# Altium PCB ECG.PcbDoc
Units mil, origin at the board's own origin, x right, y up, seen from the top; angles counter-clockwise.
Board outline 3270 x 1180 mil, 2 copper layers (Top Layer, Bottom Layer), stack 62.8 mil thick; 47 components, 28 nets, 142 pads, 7 vias.
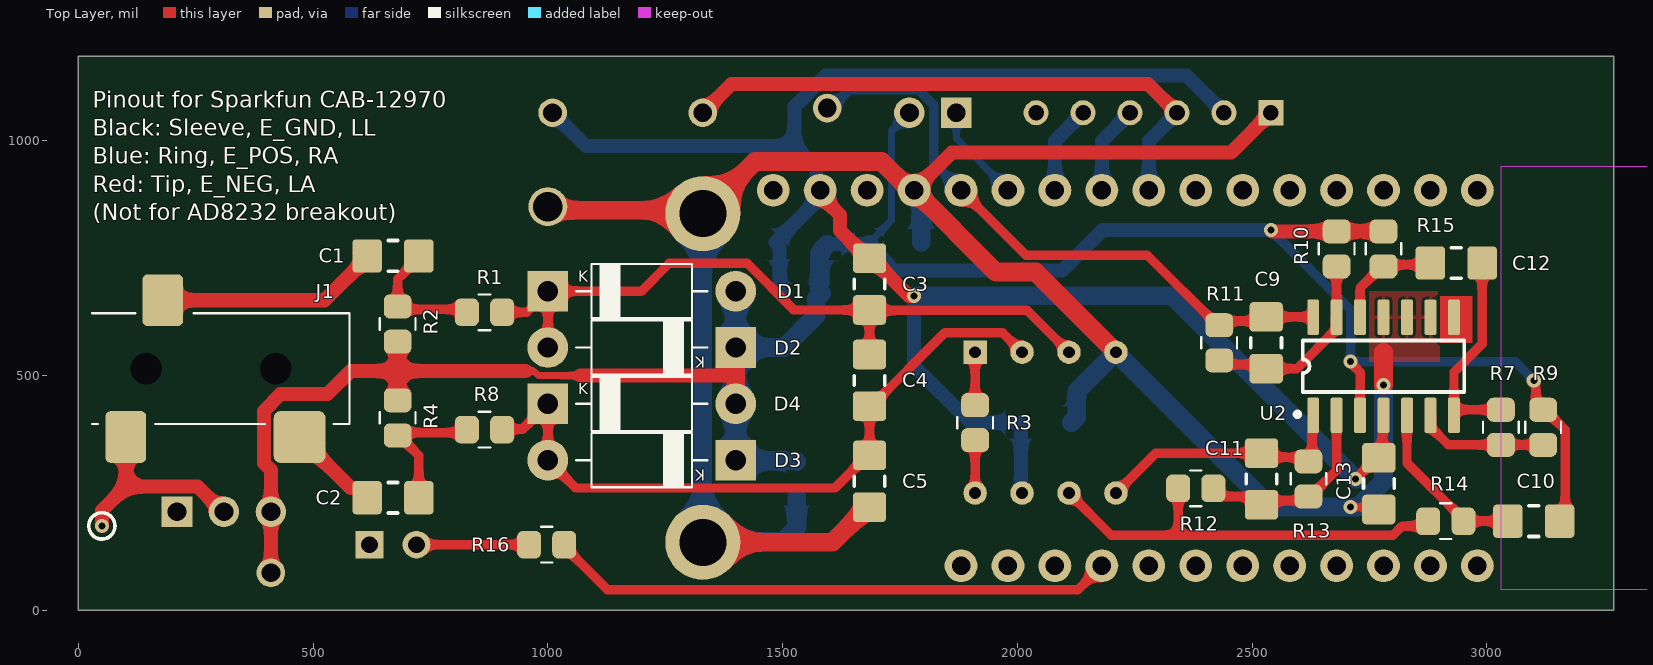
[diagram p0: Top Layer view]
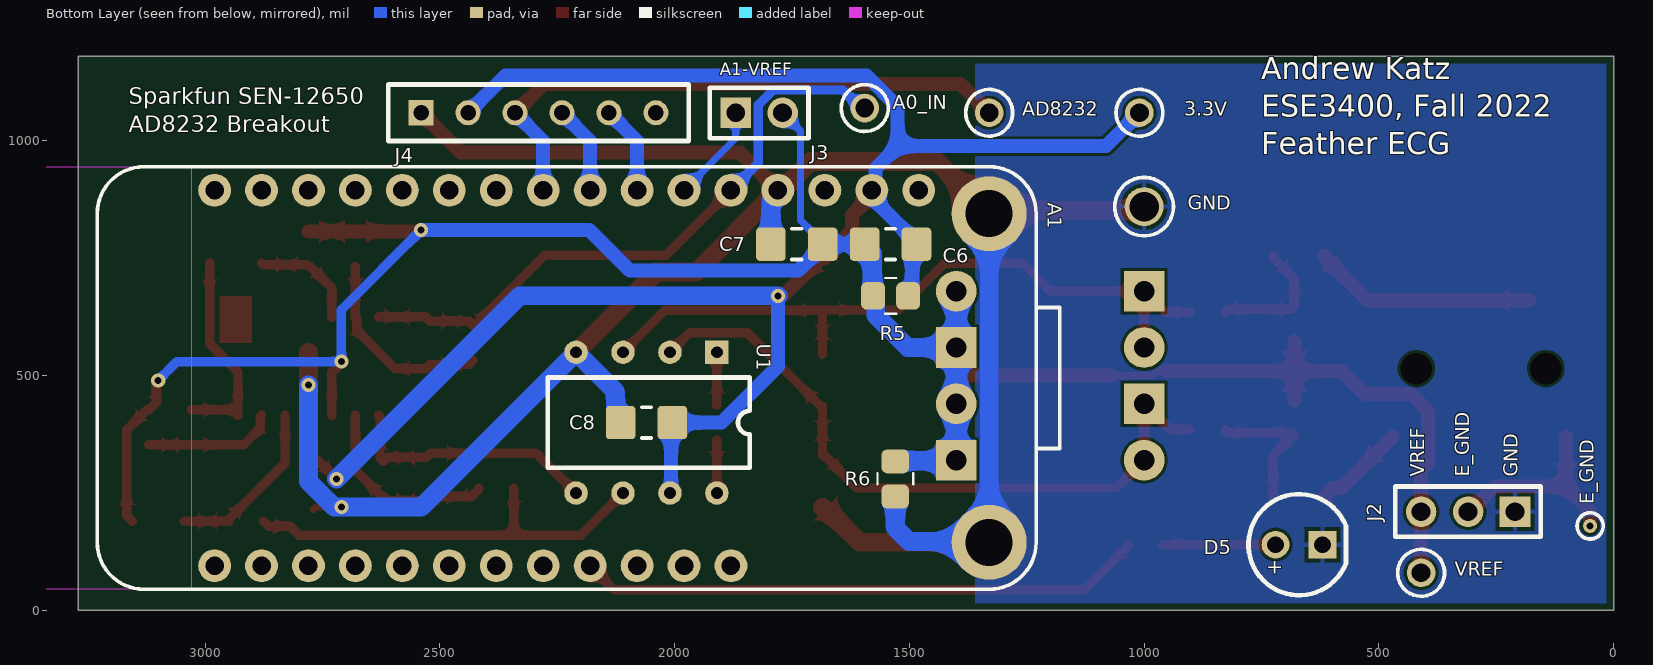
[diagram p1: Bottom Layer view, seen from below]
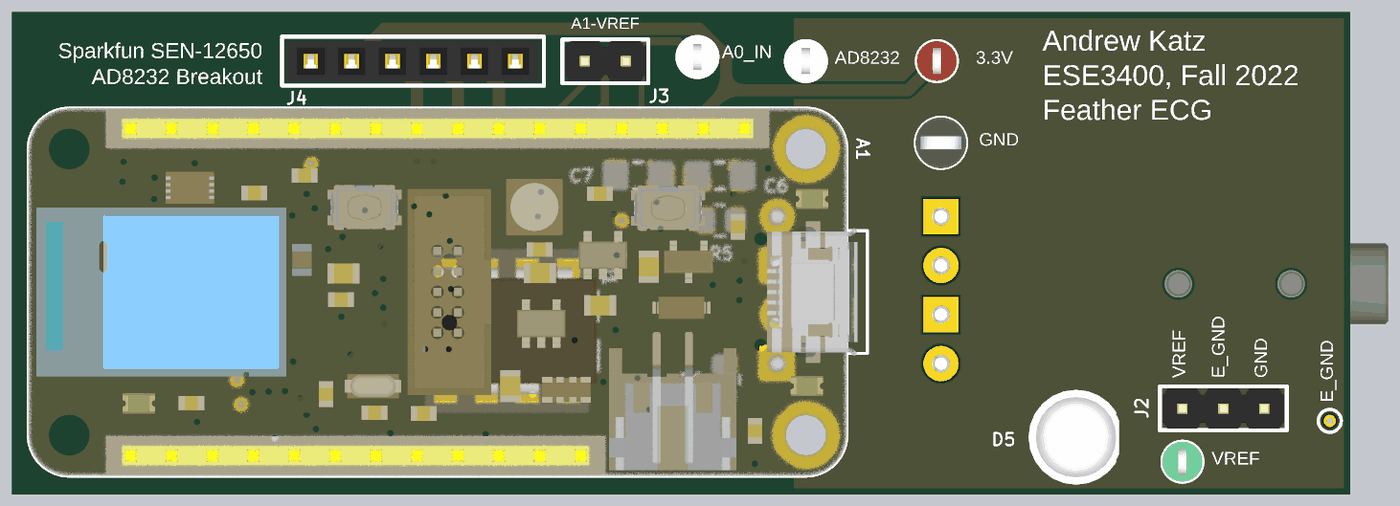
[diagram p2: 3D render of the assembled board from below, using the file's embedded part models]

## Layer stack, top to bottom
Top Solder: solder mask 1, PSR-4000BN, Dk 4.5
Top Layer: signal copper 1.4
Dielectric 1: core 60, Kingboard KB6167F, Dk 4.5
Bottom Layer: signal copper 1.4
Bottom Solder: solder mask 1, PSR-4000BN, Dk 4.5

## Board outline
0,0 3270,0 3270,1180 0,1180

## Design rules (kind name [scope] priority, off if disabled: settings)
AcuteAngle [All] p1: minimum=6.00000000000000E+0001 checktracksonly=FALSE
BoardOutlineClearance [All] p1: gap=15 ignorepadtopadclearanceinfootprint=FALSE
Clearance [All] p1: gap=6 ignorepadtopadclearanceinfootprint=FALSE except(0: Arc-Hole Track-Hole SMDPad-Hole THPad-Hole Via-Hole Fill-Hole Poly-Hole Region-Hole Text-Hole)
ComponentClearance [All] p1: gap=1 collisioncheckmode=3 verticalgap=1 showdistances=FALSE
DiffPairsRouting [All] p1: maxlimit=393.7 minlimit=6 mostfreqgap=8 toplayer_minwidth=6 toplayer_maxwidth=15 toplayer_prefwidth=8 bottomlayer_minwidth=6 bottomlayer_maxwidth=15 bottomlayer_prefwidth=8 maxuncoupledlength=500
HoleSize [All] p1: absolutevalues=TRUE maxlimit=265 minlimit=13 maxpercent=80.000 minpercent=20.000
HoleToHoleClearance [All] p1: gap=10 allowstackedmicrovias=FALSE
MinimumAnnularRing [All] p1: minimumring=7
MinimumSolderMaskSliver [All] p1: minsoldermaskwidth=0
PlaneClearance [All] p1: clearance=10
PlaneConnect [All] p1: planeconnectstyle=Direct reliefexpansion=16 reliefentries=4 reliefconductorwidth=6 reliefairgap=6
PolygonConnect [All] p1: thpad.connectstyle=Relief thpad.reliefconductorwidth=10 thpad.reliefentries=4 thpad.polygonreliefangle="90 Angle" thpad.airgapwidth=8 smdpad.connectstyle=Relief smdpad.reliefconductorwidth=8 smdpad.reliefentries=4 smdpad.polygonreliefangle="90 Angle" smdpad.airgapwidth=6 via.connectstyle=Direct via.reliefconductorwidth=8 via.reliefentries=4 via.polygonreliefangle="90 Angle" via.airgapwidth=6
RoutingCorners [All] p1: cornerstyle=45-Degree minsetback=49.21 maxsetback=49.21
RoutingVias [All] p1: holewidth=15 width=30 viastyle="Through Hole" minholewidth=13 minwidth=27 maxholewidth=100 maxwidth=114
SMDNeckDown [All] p1: percent=90.000
SilkToSilkClearance [All] p1: silktosilkclearance=0
SilkToSolderMaskClearance [IsPad] p1: minsilkscreentomaskgap=6 clearancetoexposedcopper=TRUE
SolderMaskExpansion [All] p1: expansion=2.95 istentingtop=FALSE
Width [All] p1: maxlimit=400 minlimit=6 preferedwidth=8
20 further rules are at their usual default settings.

## Components (designator, comment, footprint, x,y, rotation, side; value= is the part's Value field where it differs from the comment)
3.3V "5000" KSTN-5000 1010,1060 r180 bottom
A0_IN "5002" KSTN-5002 1595,1070 r180 bottom
A1 "Feather nRF52840 Express" "4062-Stacking Headers" 2230,495 r270 bottom locked
AD8232 "5002" KSTN-5002 1330,1060 r180 bottom
C1 "CAP 1206 1.0UF 50V 10% X7R" 1206_CAP 670,755 r0 top value=1.0UF
C2 "CAP 1206 1.0UF 50V 10% X7R" 1206_CAP 670,240 r0 top value=1.0UF
C3 "CAP 1206 1000PF 50V 10% X7R" 1206_CAP 1685,695 r90 top value=1000PF
C4 "CAP 1206 0.01UF 50V 10% X7R" 1206_CAP 1685,490 r90 top value=0.01UF
C5 "CAP 1206 1000PF 50V 10% X7R" 1206_CAP 1685,275 r90 top value=1000PF
C6 "CAP 1206 0.1UF 50V 10% X7R" 1206_cap_35H 1540,780 r0 bottom value=0.1UF
C7 "CAP 1206 0.1UF 50V 10% X7R" 1206_cap_35H 1740,780 r0 bottom value=0.1UF
C8 "CAP 1206 0.1UF 50V 10% X7R" 1206_cap_35H 2060,400 r0 bottom value=0.1UF
C9 "CAP 1206 0.47UF 50V 10% X7R" 1206_CAP 2530,570 r90 top value=0.47UF
C10 "CAP 1206 0.01UF 50V 10% X7R" 1206_CAP 3100,190 r0 top value=0.01UF
C11 "CAP 1206 0.47UF 50V 10% X7R" 1206_CAP 2520,280 r270 top value=0.47UF
C12 "CAP 1206 1.0UF 100V 10% X7R" 1206_CAP 2934.88,740 r180 top value=1.0UF
C13 "CAP 1206 0.1UF 50V 10% X7R" 1206_cap_35H 2770,270 r270 top value=0.1UF
D1 "1N4001" "DO-41 0.4in Spacing" 1200,680 r0 top
D2 "1N4001" "DO-41 0.4in Spacing" 1200,560 r180 top
D3 "1N4001" "DO-41 0.4in Spacing" 1200,320 r180 top
D4 "1N4001" "DO-41 0.4in Spacing" 1200,440 r0 top
D5 "WP7113SGD" "T-1 3/4 LED" 670,140 r0 bottom
E_GND "Testpad" "Test PTH 15-30" 50,180 r180 bottom
GND "5011" KSTN-5011_V 1000,860 r180 bottom
J1 "SJ-3523-SMT-TR" SJ-3524-SMT-TR-Footprint-1 144.41,515 r0 top
J2 "MHDR 1X3" PH1-03-UA 310,210 r0 bottom
J3 "MHDR 1X2" PH1-02-UA 1820,1060 r180 bottom
J4 "FHDR 1X6" "FHDR 1X6-Footprint-1" 2290,1060 r180 bottom
R1 "RES 0805 47K 1%" 0805_RES 865,635 r0 top value=47K
R2 "RES 0805 1M 1%" 0805_RES 680,610 r90 top value=1M
R3 "RES 0805 2.7K 1%" 0805_RES 1910,400 r270 top value=2.7K
R4 "RES 0805 1M 1%" 0805_RES 680,410 r90 top value=1M
R5 "RES 0805 1K 1%" 0805_RES 1540,670 r180 bottom value=1K
R6 "RES 0805 1K 1%" 0805_RES 1530,280 r90 bottom value=1K
R7 "RES 0805 270K 1%" 0805_RES 3030,390 r90 top value=270K
R8 "RES 0805 47K 1%" 0805_RES 865,385 r0 top value=47K
R9 "RES 0805 24K 1%" 0805_RES 3120,390 r270 top value=24K
R10 "RES 0805 330K 1%" 0805_RES 2680,770 r270 top value=330K
R11 "RES 0805 330K 1%" 0805_RES 2430,570 r90 top value=330K
R12 "RES 0805 330K 1%" 0805_RES 2380,260 r180 top value=330K
R13 "RES 0805 330K 1%" 0805_RES 2620,280 r270 top value=330K
R14 "RES 0805 100K 1%" 0805_RES 2912.6,190 r180 top value=100K
R15 "RES 0805 316K 1%" 0805_RES 2780,770 r270 top value=316K
R16 "RES 0805 56 1%" 0805_RES 997.4,140 r180 top value=56
U1 "AD623ANZ" DIP8-SOCKETED 2060,400 r270 bottom
U2 "MAX4403ASD+" AD8694ARZ-Footprint-1 2780,520 r90 top
VREF "5116" KSTN-5116 410,80 r180 bottom

## Footprints (in the part's own frame and the unit in brackets; to place one, negate y for a bottom-side part, rotate by r counter-clockwise, add the part's x,y. Pads: shape width x height; smd on the part's side, far side on the other; paste and mask are expansions set on the pad)
0805_RES [mm]
  rrect50% 1.3x1.5 smd: 1(-0.95,0) 2(0.95,0)
  silkscreen extent -0.3,-0.97 0.3,0.97, body extent -1.09,-0.7 1.09,0.7, height 1.1
1206_CAP [mm]
  rrect25% 1.6x1.8 smd: 1(-1.4,0) 2(1.4,0)
  silkscreen extent -0.25,-0.83 0.25,0.83, body extent -1.6,-0.83 1.6,0.83, height 1.91
1206_cap_35H [mm]
  rrect25% 1.6x1.8 smd: 1(-1.4,0) 2(1.4,0)
  silkscreen extent -0.25,-0.83 0.25,0.83, body extent -1.6,-0.83 1.6,0.83, height 0.89
"4062-Stacking Headers" [mil]
  round 70 hole 39.37: 1(-400,750) 2(-400,650) 3(-400,550) 4(-400,450) 5(-400,350) 6(-400,250) 7(-400,150) 8(-400,50) 9(-400,-50) 10(-400,-150) 11(-400,-250) 12(-400,-350) 13(-400,-450) 14(-400,-550) 15(-400,-650) 16(-400,-750) 17(400,-750) 18(400,-650) 19(400,-550) 20(400,-450) 21(400,-350) 22(400,-250) 23(400,-150) 24(400,-50) 25(400,50) 26(400,150) 27(400,250) 28(400,350)
  round 160 hole 100: M1(-350,900) M2(350,900)
  Keep-Out Layer region: -450,-1200 -450,-800 450,-800 450,-1200
  silkscreen extent -450,-1000 450,1050, body extent -450,-1000 450,1026, height 845
AD8694ARZ-Footprint-1 [mil]
  rrect25% 75x25 smd: 1(-104.5,150) 2(-104.5,100) 3(-104.5,50) 4(-104.5,0) 5(-104.5,-50) 6(-104.5,-100) 7(-104.5,-150) 8(104.5,-150) 9(104.5,-100) 10(104.5,-50) 11(104.5,0) 12(104.5,50) 13(104.5,100) 14(104.5,150)
  silkscreen extent -107,-172 55,188, body extent -114,-168 114,168, height 68
DIP8-SOCKETED [mil]
  rect 50x50 hole 25: 1(-150,150)
  round 50 hole 25: 2(-150,50) 3(-150,-50) 4(-150,-150) 5(150,-150) 6(150,-50) 7(150,50) 8(150,150)
  silkscreen extent -96,-210 96,220, body extent -200,-210 200,220, height 337
"DO-41 0.4in Spacing" [mm]
  rrect100% 2.2x2.2 hole 1.1: A(5.08,0)
  rect 2.2x2.2 hole 1.1: K(-5.08,0)
  silkscreen extent -3.56,-1.52 3.56,1.52, body extent -5.48,-1.35 5.48,1.35, height 3.21
"FHDR 1X6-Footprint-1" [mil]
  rect 53.29x53.29 hole 33.31: 1(-250,0)
  round 53.29 hole 33.31: 2(-150,0) 3(-50,0) 4(50,0) 5(150,0) 6(250,0)
  silkscreen extent -320,-60 320,60, body extent -308,-49 308,49, height 335
KSTN-5000 [mm] "Test Point, Through Hole, Dia 2.54mm"
  round 1.55 hole 1.016: 1(0,0)
  silkscreen extent -1.27,-1.27 1.27,1.27, body extent -1.25,-1.25 1.25,1.25, height 4.62
KSTN-5002 [mm] "Test Point, Through Hole, Dia 2.54mm"
  round 1.55 hole 1.016: 1(0,0)
  silkscreen extent -1.27,-1.27 1.27,1.27, body extent -1.24,-1.24 1.25,1.25, height 4.62
KSTN-5011_V [mm] "Test Point, Dia 3.17mm"
  round 2.1 hole 1.6: 1(0,0)
  silkscreen extent -1.59,-1.58 1.59,1.58, body extent -1.58,-1.59 1.58,1.59, height 8.12
KSTN-5116 [mm] "Test Point, Through Hole, Dia 2.54mm"
  round 1.55 hole 1.016: 1(0,0)
  silkscreen extent -1.27,-1.27 1.27,1.27, body extent -1.25,-1.25 1.25,1.25, height 4.62
PH1-02-UA [mil]
  rect 65x65 hole 40: 1(-50,0)
  round 65 hole 40: 2(50,0)
  silkscreen extent -105,-54 105,53, body extent -100,-49 100,49, height 335
PH1-03-UA [mil]
  rect 65x65 hole 40: 1(-100,0)
  round 65 hole 40: 2(0,0) 3(100,0)
  silkscreen extent -155,-54 155,53, body extent -150,-49 150,49, height 335
SJ-3524-SMT-TR-Footprint-1 [mm]
  rrect25% 2.2x2.8 smd: 1(-1.1,-3.7) 3(0.9,3.7)
  rrect25% 2.8x2.8 smd: 2(8.3,-3.7)
  round 0 hole 1.7 unplated: M1(0,0) M2(7,0)
  silkscreen extent -2.92,-3 11,3, body extent -6.02,-4.5 10.98,4.5, height 5.08
"T-1 3/4 LED" [mm]
  round 1.5 hole 0.9: A(1.27,0)
  rect 1.5x1.5 hole 0.9: K(-1.27,0)
  silkscreen extent -2.54,-2.73 2.73,2.73, body extent -2.5,-2.95 2.95,2.95, height 8.65
"Test PTH 15-30" [mil]
  round 30 hole 15 paste-99999: 1(0,0)
  silkscreen extent -28,-28 28,28

## Part data
3.3V: library part CMP-024-000000-1, "Test Point, Red, 1-Pin THD, RoHS, Bulk", Color=Red, Manufacturer=KeystoneElectronics, Brand=KeystoneElectronics, Component Type=Standard, Contact Material=PhosphorBronze, Datasheet URL=https://ciiva.com/datasheet-click-2917627?src=ciiva&sig=bd195616, Datasheet Version="Rev. G, 12/2008", Design Item ID=5000, Length=7.62mm, Manufacturer URL=http://www.keyelco.com/, Material=Nylon, Mounting Hole Size=1mm, Outside Diameter=2.54mm, Packaging=Bulk, Pin Count=1, Plating=Silver, Product=TestPoints, Product Category=CircuitBoardHardware-PCB, RoHS=True, Source="Keystone 500x Series.SchLib", Type=Miniature
A0_IN AD8232: library part CMP-024-000002-1, "Test Point, White, 1-Pin THD, RoHS, Bulk", Color=White, Manufacturer=KeystoneElectronics, Brand=KeystoneElectronics, Component Type=Standard, Contact Material=PhosphorBronze, Datasheet URL=https://ciiva.com/datasheet-click-2917627?src=ciiva&sig=bd195616, Datasheet Version="Rev. G, 12/2008", Design Item ID=5002, Length=7.62mm, Manufacturer URL=http://www.keyelco.com/, Material=Nylon, Mounting Hole Size=1mm, Outside Diameter=2.54mm, Packaging=Bulk, Pin Count=1, Plating=Silver, Product=TestPoints, Product Category=CircuitBoardHardware-PCB, RoHS=True, Source="Keystone 500x Series.SchLib", Type=Miniature
A1: library part CMP-000013-3, "Adafruit Feather nRF52840 Express (4062)", ComponentLink1Description=helpURL, ComponentLink1URL=https://learn.adafruit.com/introducing-the-adafruit-nrf52840-feather/overview, ComponentLink2Description="Module Link", ComponentLink2URL=https://www.raytac.com/product/ins.php?index_id=24
C1 C2: library part CMP-011-000623-1, "Capacitor Surface Mount 1206 Footprint 1.0UF 50V 10% Tolerance Ceramic X7R", Manufacturer=Various, PCB Package=1206, Tolerance=10%, Voltage=50V, Description in Visual="Cap SMT 1206 1.0UF 50V 10%  Cer X7R", Manufacturer P/N="CAP 1206 1.0UF 50V 10% X7R", Mount=SMT, P/N="CAP 1206 1.0UF 50V 10% X7R", Type="Ceramic X7R"
C3 C5: library part CMP-011-000635-1, "Capacitor Surface Mount 1206 Footprint 1000PF 50V 10% Tolerance Ceramic X7R", Manufacturer=Various, PCB Package=1206, Tolerance=10%, Voltage=50V, Description in Visual="Cap SMT 1206 1000PF 50V 10%  Cer X7R", Manufacturer P/N="CAP 1206 1000PF 50V 10% X7R", Mount=SMT, P/N="CAP 1206 1000PF 50V 10% X7R", Type="Ceramic X7R"
C4 C10: library part CMP-011-000556-1, "Capacitor Surface Mount 1206 Footprint 0.01UF 50V 10% Tolerance Ceramic X7R", Manufacturer=Various, PCB Package=1206, Tolerance=10%, Voltage=50V, Description in Visual="Cap SMT 1206 0.01UF 50V 10%  Cer X7R", Manufacturer P/N="CAP 1206 0.01UF 50V 10% X7R", Mount=SMT, P/N="CAP 1206 0.01UF 50V 10% X7R", Type="Ceramic X7R"
C6 C7 C8 C13: library part CMP-011-000588-1, "Capacitor Surface Mount 1206 Footprint 0.1UF 50V 10% Tolerance Ceramic X7R", Manufacturer=KEMET, Manufacturer P/N=C1206C104K5RAC7800, PCB Package=1206, Tolerance=10%, Voltage=50V, Description in Visual="Cap SMT 1206 0.1UF 50V 10%  Cer X7R", Mount=SMT, P/N="CAP 1206 0.1UF 50V 10% X7R", Type="Ceramic X7R"
C9 C11: library part CMP-011-000608-1, "Capacitor Surface Mount 1206 Footprint 0.47UF 50V 10% Tolerance Ceramic X7R", Manufacturer=Various, PCB Package=1206, Tolerance=10%, Voltage=50V, Description in Visual="Cap SMT 1206 0.47UF 50V 10%  Cer X7R", Manufacturer P/N="CAP 1206 0.47UF 50V 10% X7R", Mount=SMT, P/N="CAP 1206 0.47UF 50V 10% X7R", Type="Ceramic X7R"
C12: library part CMP-011-000618-1, "Capacitor Surface Mount 1206 Footprint 1.0UF 100V 10% Tolerance Ceramic X7R", Manufacturer=Various, PCB Package=1206, Tolerance=10%, Voltage=100V, Description in Visual="Cap SMT 1206 1.0UF 100V 10%  Cer X7R", Manufacturer P/N="CAP 1206 1.0UF 100V 10% X7R", Mount=SMT, P/N="CAP 1206 1.0UF 100V 10% X7R", Type="Ceramic X7R"
D1 D2 D3 D4: library part CMP-004-00001-1, "Rectifier Diode, 1 Phase, 1 Element, 1A, 50V V(RRM), Silicon, DO-41", Case Connection=Isolated, Forward Voltage-Max (VF)=1V, Max Operating Temperature=150°C, Max Output Current=1A, Min Operating Temperature=-65°C, Non-rep Pk Forward Current-Max=30A, Package Body Material=Plastic, Package Shape=Round, Package Style="LONG FORMMeter", Peak Reflow Temperature (Cel)=260°C, Rep Pk Reverse Voltage-Max=50V, Time @ Peak Reflow Temperature-Max (s)=40s, Diode Element Material=SILICON, Diode Type=RECTIFIER, JEDEC-95 Code=DO-41, JESD-30 Code=O-PALF-W2, JESD-609 Code=e3, Moisture Sensitivity Level=1, Number of Elements=1, Number of Pins=2, Qualification Status="Not Qualified", REACH SVHC="No SVHC", RoHS Compliant=Yes, Surface Mount=No, Terminal Finish=Tin, Terminal Form=Wire, Terminal Position=AXIAL
D5: library part CMP-00016-1, "Single Color LED, Super Bright Green, Diffused Green, T-1 3/4, 5mm", Color=Green, Current=20mA, Forward Voltage=2.2V, Millicandela Rating=40mcd, Package (Case)="T-1 3/4", Wavelength - Dominant=568nm, Wavelength - Peak=565nm
E_GND: library part CMP-00049-1, "Test Pad/Point", Pin Count=1
GND: library part CMP-024-000010-1, "Large THT Test Point, Black"
J1: library part CMP-000039-1, "3 Pole(s), Female, Surface Mount Terminal, Locking, Jack", Contact Resistance=50mR, Dielectric Withstanding Voltage (AC)=500V, Insulation Color=Black, Insulation Resistance=100MR, Max Operating Temperature=85°C, Min Operating Temperature=-25°C, Rated Current (Signal)=1A, Additional Feature="Low Profile", Audio Type=STEREO, Board Mounting Option=PEG, Body Breadth=0.197inch, Body Depth=0.669inch, Body Length=0.236inch, Body/Shell Style=JACK, Connector Type="AUDIO/RCA CONNECTOR", Contact Finish - Mating=SILVER, Contact Finish - Termination="Silver (Ag)", Contact Gender=Female, Contact Material="Copper Alloy", Contact Style="RND PIN-SKT", DIN Conformance=No, Durability=5000Cycles, IEC Conformance=No, JESD-609 Code=e4, MIL Conformance=No, Mount=Board, Mounting Option 1=LOCKING, Mounting Style="RIGHT ANGLE", Number Of Connectors=1, Number of Poles=3, Number of Ports=1, Option="General Purpose", Polarization Key="POLAR PIN POSITION", REACH SVHC=Yes, Reliability=COMMERCIAL, RoHS Compliant=Yes, Termination=SMD/SMT
J2: library part CMP-000023-1, "Header, 3-Pin, 0.1in Pitch, Male"
J3: library part CMP-000021-1, "Header, 2-Pin, 0.1in Pitch, Male"
J4: library part CMP-000043-2, "Board Connector, 6 Contact(s), 1 Row(s), Female, Straight, 0.1 inch Pitch, Solder Terminal, Locking, Black Insulator, Socket", Contact Resistance=20mR, Dielectric Withstanding Voltage (AC)=1kV, Flammability Rating="UL94 V-0", Insulation Color=Black, Insulation Resistance=1GR, Max Operating Temperature=105°C, Min Operating Temperature=-40°C, Rated Current (Signal)=3A, Body Breadth=0.098inch, Body Depth=0.335inch, Body Length=0.6inch, Body/Shell Style=SOCKET, Connector Type="BOARD CONNECTOR", Contact Finish - Mating=GOLD, Contact Finish - Termination="Tin (Sn) - with Nickel (Ni) barrier", Contact Gender=Female, Contact Pattern=RECTANGULAR, Contact Style="SQ PIN-SKT", DIN Conformance=No, Durability=300Cycles, Filter Feature=No, IEC Conformance=No, Insulation Material=Polyamide, JESD-609 Code=e3, Mating Contact Pitch=0.1inch, MIL Conformance=No, Mixed Contacts=No, Mount=Board, Mounting Option 1=LOCKING, Mounting Style=STRAIGHT, Number Of Connectors=1, Number of Contacts=6, Number Of PCB Rows=1, Number of Rows Loaded=1, Option="General Purpose", PCB Contact Pattern=RECTANGULAR, Polarization Key="POLARIZED HOUSING", REACH SVHC=Yes, Reference Standard=UL, Reliability=COMMERCIAL, RoHS Compliant=Yes, Terminal Length=0.118inch, Terminal Pitch=2.54mm, Termination=Solder
R1 R8: library part CMP-005-005155-1, "Resistor Surface Mount, 47K Ohms, 0805 Footprint, 1% Tolerance 0.125W", Manufacturer=Various, PCB Package=0805, Power Rating=0.125W, Tolerance=1%, Description in Visual="Res SMT 47K 0805  1%  0.125W", Manufacturer P/N="RES 0805 47K 1%", Mount=SMT
R2 R4: library part CMP-005-004402-1, "Resistor Surface Mount, 1M Ohms, 0805 Footprint, 1% Tolerance 0.125W", Manufacturer=Various, PCB Package=0805, Power Rating=0.125W, Tolerance=1%, Description in Visual="Res SMT 1M 0805  1%  0.125W", Manufacturer P/N="RES 0805 1M 1%", Mount=SMT
R3: library part CMP-005-004468-1, "Resistor Surface Mount, 2.7K Ohms, 0805 Footprint, 1% Tolerance 0.125W", Manufacturer=Various, PCB Package=0805, Power Rating=0.125W, Tolerance=1%, Description in Visual="Res SMT 2.7K 0805  1%  0.125W", Manufacturer P/N="RES 0805 2.7K 1%", Mount=SMT
R5 R6: library part CMP-005-004398-1, "Resistor Surface Mount, 1K Ohms, 0805 Footprint, 1% Tolerance 0.125W", Manufacturer=Various, PCB Package=0805, Power Rating=0.125W, Tolerance=1%, Description in Visual="Res SMT 1K 0805  1%  0.125W", Manufacturer P/N="RES 0805 1K 1%", Mount=SMT
R7: library part CMP-005-004676-1, "Resistor Surface Mount, 270K Ohms, 0805 Footprint, 1% Tolerance 0.125W", Manufacturer=Various, PCB Package=0805, Power Rating=0.125W, Tolerance=1%, Description in Visual="Res SMT 270K 0805  1%  0.125W", Manufacturer P/N="RES 0805 270K 1%", Mount=SMT
R9: library part CMP-005-004622-1, "Resistor Surface Mount, 24K Ohms, 0805 Footprint, 1% Tolerance 0.125W", Manufacturer=Various, PCB Package=0805, Power Rating=0.125W, Tolerance=1%, Description in Visual="Res SMT 24K 0805  1%  0.125W", Manufacturer P/N="RES 0805 24K 1%", Mount=SMT
R10 R11 R12 R13: library part CMP-005-004871-1, "Resistor Surface Mount, 330K Ohms, 0805 Footprint, 1% Tolerance 0.125W", Manufacturer=Various, PCB Package=0805, Power Rating=0.125W, Tolerance=1%, Description in Visual="Res SMT 330K 0805  1%  0.125W", Manufacturer P/N="RES 0805 330K 1%", Mount=SMT
R14: library part CMP-005-004027-1, "Resistor Surface Mount, 100K Ohms, 0805 Footprint, 1% Tolerance 0.125W", Manufacturer=Various, PCB Package=0805, Power Rating=0.125W, Tolerance=1%, Description in Visual="Res SMT 100K 0805  1%  0.125W", Manufacturer P/N="RES 0805 100K 1%", Mount=SMT
R15: library part CMP-005-004841-1, "Resistor Surface Mount, 316K Ohms, 0805 Footprint, 1% Tolerance 0.125W", Manufacturer=Various, PCB Package=0805, Power Rating=0.125W, Tolerance=1%, Description in Visual="Res SMT 316K 0805  1%  0.125W", Manufacturer P/N="RES 0805 316K 1%", Mount=SMT
R16: library part CMP-005-005284-1, "Resistor Surface Mount, 56 Ohms, 0805 Footprint, 1% Tolerance 0.125W", Manufacturer=Various, Manufacturer P/N="RES 0805 56R 1%", PCB Package=0805, Power Rating=0.125W, Tolerance=1%, Description in Visual="Res SMT 56 0805  1%  0.125W", Mount=SMT
U1: library part CMP-00046-1, "Instrumentation Amplifier, 1 Func, 350uV Offset-Max, 0.8MHz Band Width, PDIP8", Average Bias Current-Max (IIB)=27.5nA, Input Offset Current-Max (IIO)=2.5nA, Input Offset Voltage-Max=350uV, Max Operating Temperature=85°C, Max Supply Current=625uA, Min Operating Temperature=-40°C, Neg Supply Voltage Limit-Max=-6V, Neg Supply Voltage-Nom (Vsup)=-5V, Package Body Material=Plastic, Package Code=DIP, Package Equivalence Code=DIP8,.3, Package Shape=Rectangular, Package Style=IN-LINEMeter, Peak Reflow Temperature (Cel)=260°C, Power Supplies=5V, Supply Voltage Limit-Max=6V, Temperature Grade=INDUSTRIAL, Time @ Peak Reflow Temperature-Max (s)=30s, Voltage Gain-Max=1000, Voltage Gain-Min=1, Amplifier Type="INSTRUMENTATION AMPLIFIER", Bandwidth (3dB)-Nom=800kHz, Common Mode Rejection Ratio-Min=70dB, Height - Seated (Max)=5.33mm, JESD-30 Code=R-PDIP-T8, JESD-609 Code=e3, Length=9.88mm, Moisture Sensitivity Level=1, Number of Functions=1, Number of Pins=8, Qualification Status="Not Qualified", REACH SVHC=Yes, RoHS Compliant=Yes, Slew Rate=0.3V/µs, Supply Voltage-Nom (Vsup)=5V, Surface Mount=No, Terminal Finish=Tin, Terminal Form="Through Hole", Terminal Pitch=2.54mm, Terminal Position=DUAL, Width=7.62mm
U2: library part CMP-00048-4, "Operational Amplifier, 4 Func, 8000uV Offset-Max, CMOS, PDSO14", Average Bias Current-Max (IIB)=100pA, Frequency Compensation=YES, Input Offset Voltage-Max=8mV, Max Operating Temperature=125°C, Max Supply Current=3.2mA, Micropower=Yes, Min Operating Temperature=-40°C, Neg Supply Voltage Limit-Max=0V, Package Body Material=Plastic, Package Code=SOP, Package Equivalence Code=SOP14,.25, Package Shape=Rectangular, Package Style="SMALL OUTLINEMeter", Peak Reflow Temperature (Cel)=260°C, Power Supplies=5V, Supply Voltage Limit-Max=6V, Temperature Grade=AUTOMOTIVE, Time @ Peak Reflow Temperature-Max (s)=30s, Voltage Gain-Min=17780, Amplifier Type="OPERATIONAL AMPLIFIER", Architecture=VOLTAGE-FEEDBACK, Bias Current-Max (IIB) @25C=100pA, Common-mode Reject Ratio-Nom=84dB, Height - Seated (Max)=1.75mm, JESD-30 Code=R-PDSO-G14, JESD-609 Code=e3, Length=8.65mm, Low-Bias=Yes, Low-Offset=No, Moisture Sensitivity Level=1, Neg Supply Voltage-Nom (Vsup)=0V, Number of Functions=4, Number of Pins=14, Qualification Status="Not Qualified", REACH SVHC=Yes, RoHS Compliant=Yes, Slew Rate=1V/µs, Supply Voltage-Nom (Vsup)=5V, Surface Mount=Yes, Technology=CMOS, Terminal Finish=Tin, Terminal Form="Gull Wing", Terminal Pitch=1.27mm, Terminal Position=DUAL, Unity Gain BW-Nom=800kHz, Width=3.9mm
VREF: library part CMP-024-000006-1, "Test Point, Green, 1-Pin THD, RoHS, Bulk", Color=Green, Manufacturer=KeystoneElectronics, Brand=KeystoneElectronics, Component Type=Standard, Contact Material=PhosphorBronze, Datasheet URL=https://ciiva.com/datasheet-click-2917627?src=ciiva&sig=bd195616, Datasheet Version="Rev. G, 12/2008", Design Item ID=5116, Length=7.62mm, Manufacturer URL=http://www.keyelco.com/, Material=Nylon, Mounting Hole Size=1mm, Outside Diameter=2.54mm, Packaging=Bulk, Pin Count=1, Plating=Silver, Product=TestPoints, Product Category=CircuitBoardHardware-PCB, RoHS=True, Source="Keystone 500x Series.SchLib", Type=Miniature

## Via types
v1: diameter 30, hole 15, Top Layer to Bottom Layer, 7 vias

## Nets (pads, with @x,y where several pads share a name; then routed paths per layer and width w, separated by ;. In a path a pad name is that pad's centre, name@x,y a point inside that pad or via, vN(x,y) a via of type N, cw(c..) or ccw(c..) an arc to the next point about the centre after c; other vN are vias at no path point)
+3.3: 3.3V.1 A1.2 C3.2 C6.1 C8.1 C13.1 J4.2 R5.2 U1.7 U2.4 | length 4152.4
  Top Layer w20: v1(2720,280) 2720.94,280 2780,339.06 2777.5,341.56 2777.5,413 U2.4
  Top Layer w30: A1.2 1580,884.18 1622.14,842.04 1622.14,809.04 1681.06,750.12 1688.94,750.12 1769.06,670 v1(1780,670)
  Bottom Layer w30: 3.3V.1 1081.08,988.92 1525,988.92 ; R5.2 1493.74,678.86 1493.74,775.08 1484.88,783.94 1572.35,871.4 1572.35,887.35 A1.2 1572.35,902.65 1572.35,941.58 1525,988.92 ; v1(1780,670) 1780,520 1900,400 C8.1 2007.44,397.44 2007.44,252.56 U1.7 ; J4.2 2360.5,1139.5 1591.65,1139.5 1525,1072.85 1525,988.92
  Bottom Layer w40: v1(1780,670) 2330,670 v1(2720,280)
A0: A0_IN.1 A1.5 C9.2 R11.2 U2.14 | length 1338.5
  Top Layer w20: A1.5 2018.41,756.59 2276.88,756.59 2426.06,607.4 R11.2 2438.86,616.26 2521.14,616.26 C9.2 2629.38,625.12 U2.14
  Bottom Layer w20: A0_IN.1 1603.58,1070 1642.08,1108.5 1790.09,1108.5 1821.5,1077.09 1821.5,953.5 A1.5
A1: A1.6 J3.1 | length 210.6
  Bottom Layer w15: J3.1 1870,1005 A1.6
A4: A1.9 AD8232.1 J4.3 | length 1250.8
  Top Layer w30: AD8232.1 1391.51,1121.51 2278.49,1121.51 J4.3
  Bottom Layer w30: A1.9 2280,1000 J4.3
COUT: U2.8
E_GND: E_GND.1 J1.1 J2.2 | length 441.6
  Top Layer w30: E_GND.1 50,212.4 101.1,263.5 ; J1.1 101.1,263.5 ; J2.2 307.4,210 253.9,263.5 101.1,263.5
E_NEG: C2.1 J1.2 | length 199.6
  Top Layer w30: J1.2 580.08,260.43 598.39,260.43 614.88,243.94 C2.1
E_NEG_C: C2.2 R4.1 R8.1 | length 305.4
  Top Layer w20: C2.2 725.12,329.9 682.42,372.6 R4.1 686.2,378.8 821.4,378.8 R8.1
E_POS: C1.1 J1.3 | length 476.4
  Top Layer w30: J1.3 524.49,660.67 614.88,751.06 C1.1
E_POS_C: C1.2 R1.1 R2.2 | length 279
  Top Layer w20: C1.2 725.12,751.06 680,705.94 R2.2 686.2,641.2 821.4,641.2 R1.1
GND: A1.4 A1.M1 A1.M2 C5.1 C7.2 C8.2 C13.2 D5.K GND.1 J2.1 J4.1 R6.1 U1.4 U2.9 U2.10 U2.11 | length 4997.4
  Top Layer w15: v1(2710,220) 2764.88,220 C13.2
  Top Layer w30: A1.4 1860.5,975.5 2455.5,975.5 J4.1
  Top Layer w40: GND.1 1007.5,852.5 1322.5,852.5 A1.M1 1441,956 1710.88,956 1771.88,895 A1.4 1954.41,720.59 2039.41,720.59 U1.4 ; A1.M2 1606.18,145 1669.57,208.39 1673.5,208.39 C5.1 ; v1(2780,480) 2780,550
  Bottom Layer w40: A1.M1 A1.M2 1331.54,146.54 1500.49,146.54 1530,176.05 R6.1 ; A1.4 1780,886.88 1795.12,871.76 C7.2@1795.12,783.94 ; C8.2 2126.61,411.5 2126.61,466.61 U1.4 2540,220 2725.05,220 2780,274.95 v1(2780,480)
HP: C12.2 R15.2 U2.12 | length 233.9
  Top Layer w20: U2.12 2730,686.54 2776.06,732.6 R15.2 2783.7,736.3 2876.06,736.3 C12.2
LO+: A1.7 J4.5 | length 189.9
  Bottom Layer w30: A1.7 2080,1000 J4.5
LO-: A1.8 J4.4 | length 189.9
  Bottom Layer w30: A1.8 2180,1000 J4.4
LP: C10.1 R14.1 U2.5 | length 370.1
  Top Layer w20: U2.5 2830,313.94 2950,193.94 R14.1 C10.1
NetA1_25: A1.25 R16.1 | length 1208.4
  Top Layer w20: R16.1 1034.8,136.06 1126.87,44 2129,44 A1.25
NetC9_1: C9.1 R10.2 R11.1 U2.13 | length 425.5
  Top Layer w20: R11.1 2438.86,523.74 2521.14,523.74 C9.1 2595.38,514.88 2677.5,597 2677.5,622 U2.13 R10.2
NetC11_2: C11.2 R12.1 R13.2 U2.2 | length 412.5
  Top Layer w20: R12.1 2417.4,257.82 2432.78,242.44 2499.84,242.44 C11.2@2509.84,232.44 ; C11.2 2528.86,233.74 2611.14,233.74 R13.2 2623.94,242.6 2680,298.66 U2.2
NetD5_A: D5.A R16.2 | length 240
  Top Layer w20: D5.A R16.2
NetR3_1: R3.1 U1.1 | length 112.6
  Top Layer w20: R3.1 U1.1
NetR3_2: R3.2 U1.8 | length 112.6
  Top Layer w20: U1.8 R3.2
NetR7_1: R7.1 R9.2 U2.6 | length 280.7
  Top Layer w20: U2.6 2882.5,413 2882.5,388 2917.9,352.6 R9.2
OUTA: C11.1 R13.1 U1.5 U2.1 | length 554.8
  Top Layer w20: U1.5 2295.12,335.12 C11.1 2528.86,326.26 2611.14,326.26 R13.1 2627.5,324.9 2627.5,413 U2.1
"Stage 1": R12.2 R14.2 U1.6 | length 914.9
  Top Layer w20: U1.6 2200,160 2342.6,160 ; R12.2 2342.6,160 ; R14.2 2864.74,179.54 2819.61,179.54 2800.06,160 2342.6,160
"Stage 2": C12.1 R7.2 U2.7 | length 450.4
  Top Layer w20: U2.7 U2.7@2930,424.9 ; C12.1 2990,567.37 2930,507.37 U2.7@2930,424.9 ; R7.2 2932.5,427.4 U2.7@2930,424.9
VIN+: C3.1 C4.2 D1.K D2.A R1.2 U1.3 | length 1544
  Top Layer w20: R1.2 955,635 D1.K ; D2.A D1.K ; C4.2 C3.1 ; U1.3 2021,639 1685.88,639 C3.1 ; D1.K 1199.28,680 1258.59,739.31 1424.57,739.31 1523.99,639.88 C3.1
VIN-: C4.1 C5.2 D3.A D4.K R8.2 U1.2 | length 1490.1
  Top Layer w20: R8.2 903.47,386.06 946.06,386.06 D4.K D3.A 1059.31,260.69 1611.64,260.69 1681.06,330.12 C5.2 C4.1 1688.94,434.88 1845.06,591 1969,591 U1.2
VREF: C6.2 C7.1 C10.2 D1.A D2.K D3.K D4.A J2.3 J3.2 R2.1 R4.2 R5.1 R6.2 R9.1 R10.1 R15.1 U2.3 VREF.1 | length 5274.7
  Top Layer w15: 952.34,510 969.66,510 979.66,500 1070,500
  Top Layer w20: v1(2710,530) 2710,527.29 2730,507.29 U2.3 ; v1(3100,490) 3100,487.29 3104.3,482.99 3104.3,442.78 3119.68,427.4 3123.94,427.4 3166.99,384.35 3166.99,201.88 C10.2
  Top Layer w30: VREF.1 410,298.65 395.06,313.59 395.06,425.08 430.52,460.54 530.53,460.54 579.99,510 680,510 ; R4.2 680,510 ; R2.1 680,510 ; 952.34,510 680,510 ; 1070,500 1400,500 ; v1(2540,810) 2542.6,807.4 R15.1
  Top Layer w40: D4.A 1400,500 D2.K
  Bottom Layer w15: C7.1 1684.88,783.94 1731.5,830.55 1731.5,1020.72 1770,1059.22 J3.2
  Bottom Layer w20: v1(2540,810) 2710,640 v1(2710,530) 3060,530 v1(3100,490)
  Bottom Layer w30: C6.2 C7.1 ; C7.1@1684.88,776.06 1737.38,723.57 2095.47,723.57 2181.91,810 v1(2540,810)
  Bottom Layer w40: D1.A D2.K ; R6.2 1528.7,318.7 1401.3,318.7 D3.K D2.K ; C6.2 1583.62,768.5 1583.62,764.57 1578.58,759.53 1578.58,679.53 1582.52,675.59 1582.99,675.59 1571.81,664.41 1571.81,628.5 1503.31,560 D2.K ; C7.1@1684.88,776.06 C7.1
pads on no net: A1.1 A1.3 A1.10 A1.11 A1.12 A1.13 A1.14 A1.15 A1.16 A1.17 A1.18 A1.19 A1.20 A1.21 A1.22 A1.23 A1.24 A1.26 A1.27 A1.28 J1.M1 J1.M2 J4.6

## Polygon pours and split planes (outlines as drawn)
GND on Top Layer "NONET_L-01_P-001" (solid, pour order 1): 2900,680 2900,530 2750,530 2750,680
GND on Bottom Layer "NONET_L-01_P-001" (solid, remove dead copper, pour order 0): 1360,1180 1360,0 0,0 0,1180

## Other copper
Top Layer:
  rectangle net VREF: 1356.69,505 1384,520
  rectangle net COUT: 2900,570 2970,670

## Silkscreen, mask and mechanical layers (free items; w line width, h text height)
Top Overlay:
  text "Pinout for Sparkfun CAB-12970 / Black: Sleeve, E_GND, LL / Blue: Ring, E_POS, RA / Red: Tip, E_NEG, LA / (Not for AD8232 breakout)" at 30,819.36 h60
Bottom Overlay:
  text "A1-VREF" at 1904.05,1130.54 h45
  text "Sparkfun SEN-12650 / AD8232 Breakout" at 3162.33,1006.68 h60
  text "Andrew Katz / ESE3400, Fall 2022 / Feather ECG" at 750,955.75 h80
  text "GND" at 194.01,285 h50 r270
  text "E_GND" at 298.17,285 h50 r270
  text "VREF" at 394.01,285.05 h50 r270
Mechanical 32:
  the board outline again, w10

## Dimensions
0,1180 to 0,0 on Bottom Dimensions
0,0 to 3270,0 on Bottom Dimensions

## Text inside footprints (layer, text, board x,y; h text height)
A1: Designer Notes "GROUND PLANE" at 3080,770 h37.2 r90; Designer Notes "AND SIGNAL KEEP OUT" at 3116,770 h37.2 r90; Designer Notes "RECOMMENDED ON ALL LAYERS" at 3152,770 h37.2 r90
D1: Top Overlay "K" at 1065,700 h23.62; Librarian Notes "K" at 1065,700 h39.37
D2: Top Overlay "K" at 1335,540 h23.62 r180; Librarian Notes "K" at 1335,540 h39.37 r180
D3: Top Overlay "K" at 1335,300 h23.62 r180; Librarian Notes "K" at 1335,300 h39.37 r180
D4: Top Overlay "K" at 1065,460 h23.62; Librarian Notes "K" at 1065,460 h39.37
D5: Bottom Overlay "+" at 739.4,104.4 h31.5 r180
R1: Librarian Notes "HISTORY: MT 021711, OLDER FOOTPRINT. STANDARD MAX HEIGHT 1.1MM" at 798,671 h1; Librarian Notes "LOCATION: SURFACEMOUNT2LEAD.PCBLIB" at 798,673 h1; Librarian Notes "2. SS 102512, ADDED SILKSCREEN." at 798,669 h1
R2: Librarian Notes "HISTORY: MT 021711, OLDER FOOTPRINT. STANDARD MAX HEIGHT 1.1MM" at 644,543 h1 r90; Librarian Notes "LOCATION: SURFACEMOUNT2LEAD.PCBLIB" at 642,543 h1 r90; Librarian Notes "2. SS 102512, ADDED SILKSCREEN." at 646,543 h1 r90
R3: Librarian Notes "2. SS 102512, ADDED SILKSCREEN." at 1944,467 h1 r270; Librarian Notes "LOCATION: SURFACEMOUNT2LEAD.PCBLIB" at 1948,467 h1 r270; Librarian Notes "HISTORY: MT 021711, OLDER FOOTPRINT. STANDARD MAX HEIGHT 1.1MM" at 1946,467 h1 r270
R4: Librarian Notes "HISTORY: MT 021711, OLDER FOOTPRINT. STANDARD MAX HEIGHT 1.1MM" at 644,343 h1 r90; Librarian Notes "LOCATION: SURFACEMOUNT2LEAD.PCBLIB" at 642,343 h1 r90; Librarian Notes "2. SS 102512, ADDED SILKSCREEN." at 646,343 h1 r90
R5: Bottom Assembly "HISTORY: MT 021711, OLDER FOOTPRINT. STANDARD MAX HEIGHT 1.1MM" at 1607,706 h1; Bottom Assembly "LOCATION: SURFACEMOUNT2LEAD.PCBLIB" at 1607,708 h1; Bottom Assembly "2. SS 102512, ADDED SILKSCREEN." at 1607,704 h1
R6: Bottom Assembly "HISTORY: MT 021711, OLDER FOOTPRINT. STANDARD MAX HEIGHT 1.1MM" at 1566,213 h1 r270; Bottom Assembly "LOCATION: SURFACEMOUNT2LEAD.PCBLIB" at 1568,213 h1 r270; Bottom Assembly "2. SS 102512, ADDED SILKSCREEN." at 1564,213 h1 r270
R7: Librarian Notes "2. SS 102512, ADDED SILKSCREEN." at 2996,323 h1 r90; Librarian Notes "LOCATION: SURFACEMOUNT2LEAD.PCBLIB" at 2992,323 h1 r90; Librarian Notes "HISTORY: MT 021711, OLDER FOOTPRINT. STANDARD MAX HEIGHT 1.1MM" at 2994,323 h1 r90
R8: Librarian Notes "HISTORY: MT 021711, OLDER FOOTPRINT. STANDARD MAX HEIGHT 1.1MM" at 798,421 h1; Librarian Notes "LOCATION: SURFACEMOUNT2LEAD.PCBLIB" at 798,423 h1; Librarian Notes "2. SS 102512, ADDED SILKSCREEN." at 798,419 h1
R9: Librarian Notes "2. SS 102512, ADDED SILKSCREEN." at 3154,457 h1 r270; Librarian Notes "LOCATION: SURFACEMOUNT2LEAD.PCBLIB" at 3158,457 h1 r270; Librarian Notes "HISTORY: MT 021711, OLDER FOOTPRINT. STANDARD MAX HEIGHT 1.1MM" at 3156,457 h1 r270
R10: Librarian Notes "2. SS 102512, ADDED SILKSCREEN." at 2714,837 h1 r270; Librarian Notes "LOCATION: SURFACEMOUNT2LEAD.PCBLIB" at 2718,837 h1 r270; Librarian Notes "HISTORY: MT 021711, OLDER FOOTPRINT. STANDARD MAX HEIGHT 1.1MM" at 2716,837 h1 r270
R11: Librarian Notes "2. SS 102512, ADDED SILKSCREEN." at 2396,503 h1 r90; Librarian Notes "LOCATION: SURFACEMOUNT2LEAD.PCBLIB" at 2392,503 h1 r90; Librarian Notes "HISTORY: MT 021711, OLDER FOOTPRINT. STANDARD MAX HEIGHT 1.1MM" at 2394,503 h1 r90
R12: Librarian Notes "2. SS 102512, ADDED SILKSCREEN." at 2447,226 h1 r180; Librarian Notes "LOCATION: SURFACEMOUNT2LEAD.PCBLIB" at 2447,222 h1 r180; Librarian Notes "HISTORY: MT 021711, OLDER FOOTPRINT. STANDARD MAX HEIGHT 1.1MM" at 2447,224 h1 r180
R13: Librarian Notes "2. SS 102512, ADDED SILKSCREEN." at 2654,347 h1 r270; Librarian Notes "LOCATION: SURFACEMOUNT2LEAD.PCBLIB" at 2658,347 h1 r270; Librarian Notes "HISTORY: MT 021711, OLDER FOOTPRINT. STANDARD MAX HEIGHT 1.1MM" at 2656,347 h1 r270
R14: Librarian Notes "2. SS 102512, ADDED SILKSCREEN." at 2979.6,156 h1 r180; Librarian Notes "LOCATION: SURFACEMOUNT2LEAD.PCBLIB" at 2979.6,152 h1 r180; Librarian Notes "HISTORY: MT 021711, OLDER FOOTPRINT. STANDARD MAX HEIGHT 1.1MM" at 2979.6,154 h1 r180
R15: Librarian Notes "2. SS 102512, ADDED SILKSCREEN." at 2814,837 h1 r270; Librarian Notes "LOCATION: SURFACEMOUNT2LEAD.PCBLIB" at 2818,837 h1 r270; Librarian Notes "HISTORY: MT 021711, OLDER FOOTPRINT. STANDARD MAX HEIGHT 1.1MM" at 2816,837 h1 r270
R16: Librarian Notes "2. SS 102512, ADDED SILKSCREEN." at 1064.4,106 h1 r180; Librarian Notes "LOCATION: SURFACEMOUNT2LEAD.PCBLIB" at 1064.4,102 h1 r180; Librarian Notes "HISTORY: MT 021711, OLDER FOOTPRINT. STANDARD MAX HEIGHT 1.1MM" at 1064.4,104 h1 r180
U2: Designer Notes "A" at 2673.34,345 h20; Designer Notes "B" at 2873.33,345 h20; Designer Notes "C" at 2886.66,695 h20 r180; Designer Notes "D" at 2686.66,695 h20 r180; Librarian Notes "LOCATION: SOIC FOOTPRINTS.PCBLIB" at 2596,604.74 h1 r90